# Altium PCB Modular Parent Motherboard.PcbDoc (part 2 of 2)
Units mil, origin at the board's own origin, x right, y up, seen from the top; angles counter-clockwise.
Board outline 8750 x 5625 mil, 4 copper layers (Top Layer, Internal Plane 1, Internal Plane 2, Bottom Layer), stack 30.634 mil thick; 150 components, 101 nets, 734 pads, 495 vias.
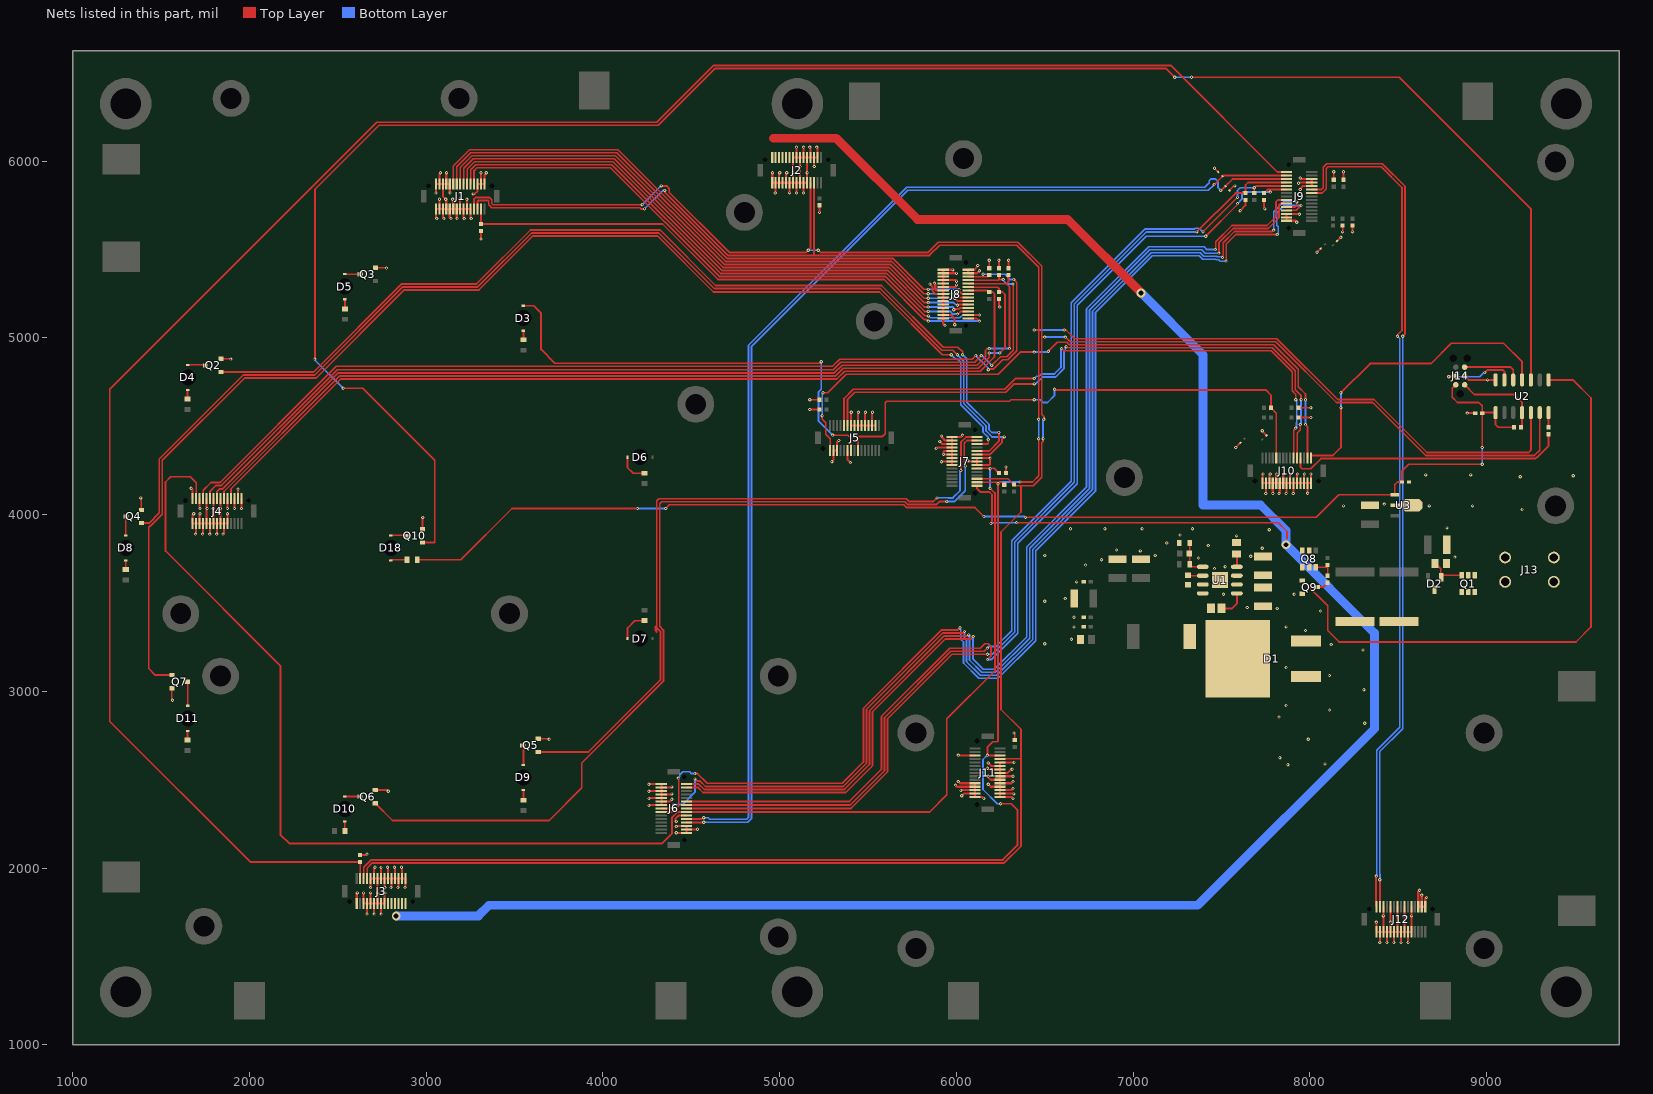
[diagram p4: the nets of this part, all layers, seen from the top]

## Via types
v1: diameter 18, hole 8, Top Layer to Bottom Layer, 492 vias
v2: diameter 50, hole 28, Top Layer to Bottom Layer, 3 vias

## Nets (pads, with @x,y where several pads share a name; then routed paths per layer and width w, separated by ;. In a path a pad name is that pad's centre, name@x,y a point inside that pad or via, vN(x,y) a via of type N, cw(c..) or ccw(c..) an arc to the next point about the centre after c; other vN are vias at no path point) (continued)
GND: C1.1 C2.1 C4.1 C5.1 C7.1 C8.1 C9.2 C10.2 C11.2 C12.2 C13.1 C14.2 D1.1 D1.3 D12.1 D13.1 D14.1 D15.1 D16.1 D17.1 J1.5 J1.6 J1.7 J1.8 J1.9 J1.10 J1.11 J1.12 J1.13 J1.14 J1.15 J1.16 J1.17 J1.18 J1.19 J1.20 J1.28 J1.29 J1.30 J2.5 J2.6 J2.7 J2.8 J2.9 J2.10 J2.11 J2.12 J2.13 J2.14 J2.15 J2.22 J2.23 J2.24 J2.25 J2.26 J2.27 J2.28 J2.29 J3.5 J3.6 J3.7 J3.8 J3.9 J3.10 J3.11 J3.12 J3.13 J3.14 J3.15 J3.22 J3.23 J3.24 J3.25 J3.26 J3.27 J3.28 J3.30 J4.5 J4.6 J4.7 J4.8 J4.9 J4.10 J4.11 J4.12 J4.13 J4.14 J4.15 J4.16 J4.18 J4.20 J4.22 J4.24 J4.26 J4.28 J4.29 J4.30 J5.7 J5.8 J5.9 J5.10 J5.11 J5.12 J5.13 J5.14 J5.25 J5.28 J5.29 J6.9 J6.10 J6.11 J6.12 J6.13 J6.14 J6.15 J6.25 J6.28 J6.29 J6.30 J7.7 J7.8 J7.9 J7.10 J7.11 J7.12 J7.13 J7.14 J7.15 J7.22 J7.23 J7.24 J8.1 J8.2 J8.3 J8.4 J8.5 J8.6 J8.7 J8.8 J8.9 J8.10 J8.11 J8.12 J8.13 J8.14 J8.15 J8.16 J8.17 J9.3 J9.4 J9.5 J9.16 J9.17 J9.18 J10.16 J10.17 J10.18 J10.19 J10.20 J10.21 J10.22 J10.23 J10.24 J10.25 J10.26 J10.27 J10.28 J10.29 J10.30 J11.5 J11.6 J11.7 J11.8 J11.9 J11.10 J11.11 J11.12 J11.13 J11.14 J11.15 J11.16 J11.17 J11.18 J11.19 J11.20 J11.28 J12.5 J12.6 J12.7 J12.8 J12.9 J12.10 J12.11 J12.12 J12.13 J12.14 J12.15 J12.18 J12.20 J12.22 J12.24 J12.26 J12.28 J12.29 J12.30 J13.3 J13.4 J14.3 Q2.2 Q3.2 Q4.2 Q5.2 Q6.2 Q7.2 Q9.2 Q10.2 R1.1 R2.1 R3.1 R4.1 R5.1 R7.1 R8.1 R10.1 R11.1 R22.1 R26.1 R27.1 R28.1 R29.1 R31.1 R32.1 R33.1 R34.1 R35.1 R36.1 R38.1 R39.1 R40.1 R41.1 U1.7 U1.9 U2.14 U3.2 | length 15860
  Top Layer w10: v1(1385,4095) 1388.31,4091.69 Q4.2@1388.31,4027.4 ; Q7.2@1559.72,3017.6 1559.72,2955.28 v1(1565,2950) ; Q2.2@1838.31,4882.4 1892.6,4882.4 v1(1895,4880) ; R3.1@2625,2074.68 2659.68,2074.68 v1(2665,2080) ; Q6.2@2711.61,2442.4 2777.6,2442.4 v1(2785,2435) ; Q3.2@2713.31,5397.4 2772.6,5397.4 v1(2775,5395) ; Q10.2@2978.31,3917.4 2978.31,3983.31 v1(2980,3985) ; v1(3310,5560) R1.1@3310,5605.31 ; Q5.2@3633.31,2732.4 3692.6,2732.4 v1(3695,2730) ; v1(5170,4595) R31.1@5225,4595 ; v1(5170,4650) R32.1@5225.31,4650 ; v1(5225,5710) R2.1@5225,5750.31 ; R36.1@6185,5394.69 v1(6185,5440) ; R33.1@6240,5220.31 6240,5180 v1(6245,5175) ; R35.1@6240,5394.69 v1(6240,5440) ; R22.1@6279.69,4235 6279.69,4269.69 v1(6280,4270) ; R34.1@6295,5394.69 v1(6295,5440) ; v1(6325,2765) 6330,2760 R4.1@6330,2724.37 ; v1(7460,5960) D14.1@7481.62,5938.38 ; D15.1@7545,5835 7570,5860 v1(7575,5860) ; v1(7580,4380) D13.1@7606.62,4406.62 ; v1(7605,5720) 7635,5750 R28.1@7635,5780 ; v1(7730,4475) 7730,4471.77 D12.1@7753.38,4448.38 ; R29.1@7740,5780.31 7740,5735 v1(7745,5730) ; R27.1@7934.69,4550 v1(8005,4550) ; R26.1@7934.69,4605 v1(8005,4605) ; v1(8040,5485) D17.1@8061.62,5506.62 ; R41.1@8135,5894.69 v1(8135,5940) ; D16.1@8153.38,5548.38 v1(8175,5570) ; v1(8185,5600) R38.1@8185,5635.31 ; R40.1@8190,5895 v1(8190,5940) ; v1(8240,5600) R39.1@8240,5635.31 ; J14.3@8875,4785 8897.48,4762.52 U2.14@9050,4762.52 ; v1(8890,4575) C12.2@8935.31,4575
  Top Layer w11.8: v1(1670,4150) 1678.78,4141.22 J4.16@1678.78,4091.73 ; v1(1685,4005) 1678.78,3998.78 J4.15@1678.78,3950 J4.14@1698.46,3950 ; v1(1695,3890) 1698.46,3893.46 J4.14@1698.46,3950 ; J4.18@1718.15,4091.73 1718.15,4036.85 v1(1720,4035) ; v1(1720,4005) 1718.15,4003.15 J4.13@1718.15,3950 ; v1(1735,3890) 1737.83,3892.83 J4.12@1737.83,3950 ; J4.20@1757.52,4091.73 v1@1757.52,4037.48 ; v1(1760,4035) v1@1757.52,4037.48 ; v1(1775,3890) 1777.2,3892.2 J4.10@1777.2,3950 ; J4.22@1796.89,4091.73 1796.89,4036.89 v1(1795,4035) 1796.89,4033.11 J4.9@1796.89,3950 ; v1(1815,3890) 1816.57,3891.57 J4.8@1816.57,3950 ; J4.24@1836.26,4091.73 1836.26,4036.26 v1(1835,4035) 1836.26,4033.74 J4.7@1836.26,3950 ; v1(1850,3890) 1855.94,3895.94 J4.6@1855.94,3950 ; v1(1875,4005) 1875.63,4004.37 J4.5@1875.63,3950 J4.6@1855.94,3950 ; v1(1875,4035) 1875.63,4035.63 J4.26@1875.63,4091.73 ; v1(1915,4035) J4.28@1915,4091.73 ; J4.29@1934.68,4091.73 1934.68,4144.68 v1(1935,4145) ; J4.30@1954.37,4091.73 1954.37,4035.63 v1(1955,4035) ; J3.30@2606.73,1799.8 2606.73,1856.73 v1(2610,1860) ; v1(2645,1860) 2646.1,1858.9 J3.28@2646.1,1799.8 J3.27@2665.79,1799.8 ; v1(2665,1740) 2665.79,1740.79 J3.27@2665.79,1799.8 ; v1(2685,1860) 2685.47,1859.53 J3.26@2685.47,1799.8 ; v1(2685,1890) 2685.47,1890.47 J3.5@2685.47,1941.54 J3.6@2705.16,1941.54 ; v1(2705,1740) 2705.16,1740.16 J3.25@2705.16,1799.8 ; v1(2710,2005) 2705.16,2000.16 J3.6@2705.16,1941.54 ; v1(2725,1860) v1@2724.84,1859.84 ; 2725,1890 2724.84,1890.16 ; v1(2744.53,2004.53) J3.8@2744.53,1941.54 ; v1(2745,1740) 2744.53,1740.47 J3.23@2744.53,1799.8 ; v1(2765,1860) 2764.21,1859.21 J3.22@2764.21,1799.8 J3.23@2744.53,1799.8 ; v1(2765,1890) 2764.21,1890.79 J3.9@2764.21,1941.54 ; v1(2780,2005) 2783.9,2001.1 J3.10@2783.9,1941.54 ; v1(2800,1890) 2803.58,1893.58 J3.11@2803.58,1941.54 ; v1(2820,2005) 2823.27,2001.73 J3.12@2823.27,1941.54 ; v1(2840,1890) 2842.95,1892.95 J3.13@2842.95,1941.54 ; v1(2860,2005) 2862.64,2002.36 J3.14@2862.64,1941.54 ; v1(2880,1890) 2882.32,1892.32 J3.15@2882.32,1941.54 J3.14@2862.64,1941.54 ; v1(3055,5820) 3054.41,5820.59 J1.16@3054.41,5871.73 J1.17@3074.09,5871.73 ; v1(3060,5675) 3054.41,5680.59 J1.15@3054.41,5730 J1.14@3074.09,5730 ; v1(3075,5785) 3074.09,5784.09 J1.14@3074.09,5730 ; v1(3080,5935) 3074.09,5929.09 J1.17@3074.09,5871.73 ; v1(3100,5675) 3093.78,5681.22 J1.13@3093.78,5730 ; v1(3115,5935) 3113.46,5933.46 J1.19@3113.46,5871.73 ; v1(3135,5820) 3133.15,5821.85 J1.20@3133.15,5871.73 J1.19@3113.46,5871.73 ; v1(3140,5675) 3133.15,5681.85 J1.11@3133.15,5730 ; v1(3150,5785) 3152.83,5782.17 J1.10@3152.83,5730 ; v1(3175,5675) 3172.52,5677.48 J1.9@3172.52,5730 ; v1(3190,5785) 3192.2,5782.8 J1.8@3192.2,5730 ; v1(3215,5675) 3211.89,5678.11 J1.7@3211.89,5730 ; v1(3230,5785) 3231.57,5783.43 J1.6@3231.57,5730 ; v1(3255,5675) 3251.26,5678.74 J1.5@3251.26,5730 J1.6@3231.57,5730 ; v1(3265,5815) 3275,5815 3290.63,5830.63 J1.28@3290.63,5871.73 J1.29@3310.31,5871.73 ; v1(3310,5935) 3310.31,5934.69 J1.29@3310.31,5871.73 ; v1(3340,5935) 3340,5930 3330,5920 J1.30@3330,5871.73 J1.29@3310.31,5871.73 ; v1(4260,2355) 4262.48,2357.48 J6.9@4330,2357.48 J6.10@4330,2377.17 ; v1(4260,2395) 4261.85,2396.85 J6.11@4330,2396.85 ; v1(4260,2435) 4261.22,2436.22 J6.13@4330,2436.22 ; v1(4260,2475) 4260.59,2475.59 J6.15@4330,2475.59 J6.14@4330,2455.91 ; v1(4390,2390) 4377.17,2377.17 J6.10@4330,2377.17 ; v1(4390,2420) 4386.54,2416.54 J6.12@4330,2416.54 ; v1(4390,2460) 4385.91,2455.91 J6.14@4330,2455.91 ; v1(4415,2200) J6.30@4471.73,2200 J6.29@4471.73,2219.69 ; v1(4415,2235) 4419.37,2239.37 J6.28@4471.73,2239.37 J6.29@4471.73,2219.69 ; v1(4415,2265) 4410,2270 4410,2279.69 4428.74,2298.43 J6.25@4471.73,2298.43 ; v1(4535,2220) 4534.69,2219.69 J6.29@4471.73,2219.69 ; v1(4960,5935) 4957.52,5932.52 J2.15@4957.52,5878.27 J2.14@4977.2,5878.27 ; v1(4975,5820) 4977.2,5822.2 J2.14@4977.2,5878.27 ; v1(5000,5935) 4996.89,5931.89 J2.13@4996.89,5878.27 ; v1(5040,5935) 5036.26,5931.26 J2.11@5036.26,5878.27 ; v1(5055.94,5820.94) J2.10@5055.94,5878.27 ; v1(5095,5820) 5095.31,5820.31 J2.8@5095.31,5878.27 ; v1(5095,6080) 5095.31,6079.69 J2.23@5095.31,6020 ; v1(5134.68,5820.32) J2.6@5134.68,5878.27 ; v1(5135,6080) 5135,6020.32 J2.25@5134.68,6020 ; v1(5155,5935) v1@5154.37,5934.37 ; v1(5170,6080) 5174.05,6075.95 J2.27@5174.05,6020 ; v1(5195,5970) 5193.74,5971.26 J2.28@5193.74,6020 ; v1(5210,6080) 5213.42,6076.58 J2.29@5213.42,6020 J2.28@5193.74,6020 ; v1(5295,4300) 5305.32,4310.32 J5.29@5305.32,4363.27 J5.28@5325,4363.27 5325,4410 v1(5335,4420) ; J5.25@5384.06,4363.27 5384.06,4310.94 v1(5400,4295) ; v1(5405,4580) 5403.74,4578.74 J5.7@5403.74,4505 J5.8@5423.43,4505 J5.9@5443.11,4505 ; v1(5445,4580) 5443.11,4578.11 J5.9@5443.11,4505 ; v1(5485,4580) 5482.48,4577.48 J5.11@5482.48,4505 ; v1(5525,4580) 5521.85,4576.85 J5.13@5521.85,4505 ; J5.14@5541.54,4505 J5.13@5521.85,4505 ; v1(5850,5305) 5865,5290 5865,5265 5881.89,5248.11 J8.8@5925,5248.11 ; v1(5875,5310) 5880,5305 5880,5275 5887.2,5267.8 J8.9@5925,5267.8 ; v1(5885,4375) 5890.32,4380.32 J7.12@5975,4380.32 ; v1(5905,4415) 5920,4400 J7.13@5975,4400 ; v1(5915,4300) 5916.58,4301.58 J7.8@5975,4301.58 ; v1(5915,4445) 5915,4440 5935.31,4419.69 J7.14@5975,4419.69 ; v1(5935,5070) 5925,5080 J8.1@5925,5110.31 J8.2@5925,5130 ; J7.7@5975,4281.89 J7.8@5975,4301.58 ; v1(5980,5385) 5979.09,5385.91 J8.15@5925,5385.91 J8.14@5925,5366.22 ; v1(5990,5075) 5990,5110 5970,5130 J8.2@5925,5130 ; v1(5995,2470) 6004.06,2460.94 J11.19@6105,2460.94 ; v1(6000,5300) 6000,5295 5992.48,5287.48 J8.10@5925,5287.48 ; v1(6000,5320) 6000,5325 5998.15,5326.85 J8.12@5925,5326.85 ; v1(6000,5365) 5998.78,5366.22 J8.14@5925,5366.22 ; v1(6010,2490) 6019.37,2480.63 J11.20@6105,2480.63 J11.19@6105,2460.94 ; v1(6010,2640) 6011.89,2638.11 J11.28@6105,2638.11 ; v1(6025,2440) 6026.26,2441.26 J11.18@6105,2441.26 ; v1(6030,2410) 6041.57,2421.57 J11.17@6105,2421.57 ; v1(6035,4450) 6024.37,4439.37 J7.15@5975,4439.37 J7.14@5975,4419.69 ; v1(6065,4305) 6068.42,4301.58 J7.23@6116.73,4301.58 ; v1(6120,5410) 6120,5405 6100.91,5385.91 J8.16@6066.73,5385.91 J8.17@6066.73,5366.22 6116.22,5366.22 v1(6130,5380) ; v1(6155,2395) 6148.11,2401.89 J11.16@6105,2401.89 J11.17@6105,2421.57 ; v1(6175,2565) 6180.63,2559.37 J11.7@6246.73,2559.37 ; v1(6180,2475) 6194.06,2460.94 J11.12@6246.73,2460.94 ; v1(6180,2520) 6180,2515 6194.69,2500.32 J11.10@6246.73,2500.32 ; v1(6180,2595) 6195.94,2579.06 J11.6@6246.73,2579.06 ; v1(6315,2560) 6310,2560 6289.69,2539.69 J11.8@6246.73,2539.69 ; v1(6320,2395) 6313.11,2401.89 J11.15@6246.73,2401.89 J11.14@6246.73,2421.57 ; v1(6320,2450) 6311.26,2441.26 J11.13@6246.73,2441.26 ; v1(6320,2490) 6310.63,2480.63 J11.11@6246.73,2480.63 ; v1(6320,2520) J11.9@6246.73,2520 ; v1(6325,2420) 6323.43,2421.57 J11.14@6246.73,2421.57 ; v1(6326.26,2598.74) J11.5@6246.73,2598.74 J11.6@6246.73,2579.06 ; v1(7735,4230) 7730.63,4225.63 J10.30@7730.63,4178.27 J10.29@7750.32,4178.27 ; v1(7750,4120) 7750.32,4120.32 J10.29@7750.32,4178.27 ; v1(7775,4230) 7770,4225 J10.28@7770,4178.27 ; v1(7790,4120) 7789.69,4120.31 J10.27@7789.69,4178.27 ; v1(7810,4230) 7809.37,4229.37 J10.26@7809.37,4178.27 ; v1(7825,4120) 7829.06,4124.06 J10.25@7829.06,4178.27 ; v1(7850,4230) 7848.74,4228.74 J10.24@7848.74,4178.27 ; v1(7865,4120) 7868.43,4123.43 J10.23@7868.43,4178.27 ; v1(7890,4230) 7888.11,4228.11 J10.22@7888.11,4178.27 ; v1(7905,4120) 7907.8,4122.8 J10.21@7907.8,4178.27 ; v1(7925,5655) 7917.17,5662.83 J9.16@7868.27,5662.83 J9.17@7868.27,5682.52 J9.18@7868.27,5702.2 7937.8,5702.2 v1(7940,5700) ; v1(7930,4230) 7927.48,4227.48 J10.20@7927.48,4178.27 ; v1(7935,5875) 7939.37,5879.37 J9.4@8010,5879.37 ; v1(7945,5840) 7945,5845 7959.68,5859.68 J9.5@8010,5859.68 J9.4@8010,5879.37 ; v1(7945,5905) 7950.95,5899.05 J9.3@8010,5899.05 J9.4@8010,5879.37 ; v1(7970,4230) 7966.85,4226.85 J10.18@7966.85,4178.27 ; v1(7986.54,4121.54) J10.17@7986.54,4178.27 ; v1(8005,4230) 8006.22,4228.78 J10.16@8006.22,4178.27 J10.17@7986.54,4178.27 ; v1(8375,1695) 8376.57,1693.43 J12.15@8376.57,1640 J12.14@8396.26,1640 ; v1(8395,1580) 8396.26,1581.26 J12.14@8396.26,1640 ; J12.18@8415.94,1781.73 8415.94,1730.94 v1(8415,1730) 8415.94,1729.06 J12.13@8415.94,1640 ; v1(8435,1580) 8435.63,1580.63 J12.12@8435.63,1640 ; J12.20@8455.32,1781.73 8455.32,1695.32 v1(8455,1695) 8455.32,1694.68 J12.11@8455.32,1640 ; v1(8475,1580) J12.10@8475,1640 ; J12.22@8494.68,1781.73 v1@8494.68,1730.32 ; 8495,1695 8494.68,1694.68 ; v1(8495,1730) v1@8494.68,1730.32 ; v1(8515,1580) 8514.37,1580.63 J12.8@8514.37,1640 ; J12.24@8534.06,1781.73 v1@8534.06,1694.06 ; v1(8535,1695) v1@8534.06,1694.06 ; v1(8555,1580) 8553.74,1581.26 J12.6@8553.74,1640 ; J12.26@8573.43,1781.73 v1@8573.43,1731.57 ; v1(8575,1730) v1@8573.43,1731.57 ; v1(8620,1875) 8612.8,1867.8 J12.28@8612.8,1781.73 J12.29@8632.48,1781.73 ; v1(8632.48,1847.48) J12.29@8632.48,1781.73 ; v1(8660,1835) 8652.17,1827.17 J12.30@8652.17,1781.73 J12.29@8632.48,1781.73 ; J4.14@1698.46,3950 J4.13@1718.15,3950 ; J4.13@1718.15,3950 J4.12@1737.83,3950 ; J4.12@1737.83,3950 J4.11@1757.52,3950 ; J4.11@1757.52,3950 J4.10@1777.2,3950 ; J4.11@1757.52,3950 v1@1757.52,4037.48 ; J4.10@1777.2,3950 J4.9@1796.89,3950 ; J4.9@1796.89,3950 J4.8@1816.57,3950 ; J4.8@1816.57,3950 J4.7@1836.26,3950 ; J4.7@1836.26,3950 J4.6@1855.94,3950 ; J3.27@2665.79,1799.8 J3.26@2685.47,1799.8 ; J3.26@2685.47,1799.8 J3.25@2705.16,1799.8 ; J3.25@2705.16,1799.8 J3.24@2724.84,1799.8 ; J3.6@2705.16,1941.54 J3.7@2724.84,1941.54 ; J3.24@2724.84,1799.8 v1@2724.84,1859.84 ; J3.24@2724.84,1799.8 J3.23@2744.53,1799.8 ; v1@2724.84,1859.84 2724.84,1890.16 ; 2724.84,1890.16 J3.7@2724.84,1941.54 ; J3.7@2724.84,1941.54 J3.8@2744.53,1941.54 ; J3.8@2744.53,1941.54 J3.9@2764.21,1941.54 ; J3.9@2764.21,1941.54 J3.10@2783.9,1941.54 ; J3.10@2783.9,1941.54 J3.11@2803.58,1941.54 ; J3.11@2803.58,1941.54 J3.12@2823.27,1941.54 ; J3.12@2823.27,1941.54 J3.13@2842.95,1941.54 ; J3.13@2842.95,1941.54 J3.14@2862.64,1941.54 ; J1.14@3074.09,5730 J1.13@3093.78,5730 ; J1.17@3074.09,5871.73 J1.18@3093.78,5871.73 ; J1.13@3093.78,5730 J1.12@3113.46,5730 ; J1.18@3093.78,5871.73 3093.78,5801.22 v1(3110,5785) 3113.46,5781.54 J1.12@3113.46,5730 ; J1.18@3093.78,5871.73 J1.19@3113.46,5871.73 ; J1.12@3113.46,5730 J1.11@3133.15,5730 ; J1.11@3133.15,5730 J1.10@3152.83,5730 ; J1.10@3152.83,5730 J1.9@3172.52,5730 ; J1.9@3172.52,5730 J1.8@3192.2,5730 ; J1.8@3192.2,5730 J1.7@3211.89,5730 ; J1.7@3211.89,5730 J1.6@3231.57,5730 ; J6.10@4330,2377.17 J6.11@4330,2396.85 ; J6.11@4330,2396.85 J6.12@4330,2416.54 ; J6.12@4330,2416.54 J6.13@4330,2436.22 ; J6.13@4330,2436.22 J6.14@4330,2455.91 ; J2.14@4977.2,5878.27 J2.13@4996.89,5878.27 ; J2.13@4996.89,5878.27 J2.12@5016.57,5878.27 J2.11@5036.26,5878.27 ; J2.11@5036.26,5878.27 J2.10@5055.94,5878.27 ; J2.10@5055.94,5878.27 J2.9@5075.63,5878.27 ; J2.9@5075.63,5878.27 v1(5075.63,5934.37) J2.22@5075.63,6020 J2.23@5095.31,6020 ; J2.9@5075.63,5878.27 J2.8@5095.31,5878.27 ; J2.8@5095.31,5878.27 J2.7@5115,5878.27 ; J2.23@5095.31,6020 J2.24@5115,6020 ; J2.7@5115,5878.27 5115,5935 v1(5115,5970) J2.24@5115,6020 ; J2.7@5115,5878.27 J2.6@5134.68,5878.27 ; J2.24@5115,6020 J2.25@5134.68,6020 ; J2.6@5134.68,5878.27 J2.5@5154.37,5878.27 v1@5154.37,5934.37 ; J2.25@5134.68,6020 J2.26@5154.37,6020 ; v1@5154.37,5934.37 J2.26@5154.37,6020 ; J2.26@5154.37,6020 J2.27@5174.05,6020 ; J2.27@5174.05,6020 J2.28@5193.74,6020 ; J5.9@5443.11,4505 J5.10@5462.8,4505 J5.11@5482.48,4505 ; J5.11@5482.48,4505 J5.12@5502.17,4505 J5.13@5521.85,4505 ; J8.2@5925,5130 J8.3@5925,5149.69 J8.4@5925,5169.37 J8.5@5925,5189.06 J8.6@5925,5208.74 J8.7@5925,5228.43 J8.8@5925,5248.11 ; J8.8@5925,5248.11 J8.9@5925,5267.8 ; J8.9@5925,5267.8 J8.10@5925,5287.48 ; J8.10@5925,5287.48 J8.11@5925,5307.17 J8.12@5925,5326.85 ; J8.12@5925,5326.85 J8.13@5925,5346.54 J8.14@5925,5366.22 ; J7.8@5975,4301.58 J7.9@5975,4321.26 J7.10@5975,4340.95 ; J7.10@5975,4340.95 v1(5925.95,4340.95) 5925.95,4355.95 5930.63,4360.63 J7.11@5975,4360.63 ; J7.10@5975,4340.95 J7.11@5975,4360.63 ; J7.11@5975,4360.63 J7.12@5975,4380.32 ; J7.12@5975,4380.32 J7.13@5975,4400 ; J7.13@5975,4400 J7.14@5975,4419.69 ; J11.17@6105,2421.57 J11.18@6105,2441.26 ; J11.18@6105,2441.26 J11.19@6105,2460.94 ; J7.23@6116.73,4301.58 J7.24@6116.73,4281.89 6186.9,4281.9 6190,4285 v1(6190,4320) 6188.74,4321.26 J7.22@6116.73,4321.26 J7.23@6116.73,4301.58 ; J11.14@6246.73,2421.57 J11.13@6246.73,2441.26 ; J11.13@6246.73,2441.26 J11.12@6246.73,2460.94 ; J11.12@6246.73,2460.94 J11.11@6246.73,2480.63 ; J11.11@6246.73,2480.63 J11.10@6246.73,2500.32 ; J11.10@6246.73,2500.32 J11.9@6246.73,2520 ; J11.9@6246.73,2520 J11.8@6246.73,2539.69 ; J11.8@6246.73,2539.69 J11.7@6246.73,2559.37 ; J11.7@6246.73,2559.37 J11.6@6246.73,2579.06 ; J10.29@7750.32,4178.27 J10.28@7770,4178.27 ; J10.28@7770,4178.27 J10.27@7789.69,4178.27 ; J10.27@7789.69,4178.27 J10.26@7809.37,4178.27 ; J10.26@7809.37,4178.27 J10.25@7829.06,4178.27 ; J10.25@7829.06,4178.27 J10.24@7848.74,4178.27 ; J10.24@7848.74,4178.27 J10.23@7868.43,4178.27 ; J10.23@7868.43,4178.27 J10.22@7888.11,4178.27 ; J10.22@7888.11,4178.27 J10.21@7907.8,4178.27 ; J10.21@7907.8,4178.27 J10.20@7927.48,4178.27 ; J10.20@7927.48,4178.27 J10.19@7947.17,4178.27 J10.18@7966.85,4178.27 ; J10.18@7966.85,4178.27 J10.17@7986.54,4178.27 ; J12.14@8396.26,1640 J12.13@8415.94,1640 ; J12.13@8415.94,1640 J12.12@8435.63,1640 ; J12.12@8435.63,1640 J12.11@8455.32,1640 ; J12.11@8455.32,1640 J12.10@8475,1640 ; J12.10@8475,1640 J12.9@8494.68,1640 ; J12.9@8494.68,1640 8494.68,1694.68 ; J12.9@8494.68,1640 J12.8@8514.37,1640 ; 8494.68,1694.68 v1@8494.68,1730.32 ; J12.8@8514.37,1640 J12.7@8534.06,1640 ; J12.7@8534.06,1640 v1@8534.06,1694.06 ; J12.7@8534.06,1640 J12.6@8553.74,1640 ; J12.6@8553.74,1640 J12.5@8573.43,1640 v1@8573.43,1731.57
  other v1: 7875,2585 8085,2590 7830,2625 7990,2730 8310,2820 7825,2855 8110,2895 7865,2920 8305,3010 8110,3090 7865,3135 8300,3235 8120,3265 6500,3270 6650,3295 7975,3345 6665,3365 7865,3365 6665,3420 8060,3455 7815,3470 7645,3475 6500,3510 6615,3525 7510,3550 7910,3550 6680,3620 7460,3695 7520,3705 6730,3715 6820,3745 7370,3755 8820,3760 7665,3765 6500,3770 7125,3770 7040,3795 6905,3800 7730,3810 7425,3825 7190,3840 7585,3880 7265,3885 7770,3915 6645,3920 6840,3920 7050,3920 7335,3920 8775,3925 9200,4030 8190,4050 8675,4050 8920,4050 8420,4060 9190,4215 9490,4220 8655,4225 8910,4225 9005,4762.52
GPS_1PPS: J4.17 J6.24 J7.25 R22.2 | length 8615.7
  Top Layer w10: J4.17@1698.46,4091.73 1698.46,4181.54 1665,4215 1555,4215 1525,4185 1525,3795 2175,3145 2175,2190 2225,2140 4335,2140 4390,2195 4390,2285 4423.11,2318.11 J6.24@4471.73,2318.11 5848.11,2318.11 5945,2415 5945,2845 6218,3118 6218,4122 v1(6190,4150) ; J7.25@6116.73,4262.21 6213.11,4262.21 R22.2@6240.31,4235
  Bottom Layer w10: v1(6190,4150) v1(6190,4260)
HEARTBEAT_LED: J7.21 Q4.1 | length 6580.9
  Top Layer w10: Q4.1@1388.31,3952.6 1432.6,3952.6 1490,4010 1490,4315 1965.6,4790.6 2369.64,4790.6 2867.64,5288.6 3291.68,5288.6 3596.77,5593.69 4315.9,5593.69 4629.58,5280 5568.83,5280 5917.83,4931 5979,4931 v1(6005,4905) ; J7.21@6116.73,4340.95 6116.79,4341 6190.04,4341 6257,4407.96 6257,4427 v1(6270,4440)
  Bottom Layer w10: v1(6005,4905) 6041,4869 6041,4629 6167,4503 6167,4474.26 6201.26,4440 v1(6270,4440)
HOSTRX_CELLTX: J5.6 J10.11 | length 3443.6
  Top Layer w10: J5.6@5384.06,4505 5384,4505.06 5384,4652.83 5424.17,4693 6279.17,4693 6326.17,4740 v1(6440,4740) ; v1(6620,4950) 6625,4945 7787.12,4945 7916.74,4815.38 7916.74,4707.3 7950,4674.04 v1(7950,4650) ; J10.11@7927.48,4320 7927.48,4462.48 7945,4480 v1(7945,4510)
  Bottom Layer w10: v1(6440,4740) 6448.08,4740 6487.08,4779 6561.12,4779 6608,4825.88 6608,4923.3 6616,4931.3 6616,4946 v1(6620,4950) ; v1(7945,4510) 7950,4515 v1(7950,4650)
HOSTRX_EXPTX: J9.7 J12.16 | length 4828.9
  Top Layer w10: J9.7@8010,5820.31 8069.36,5820.31 8092,5842.96 8092,5957.96 8102.04,5968 8402.96,5968 8520.46,5850.5 8520.46,5042.48 8495,5017.02 v1(8495,5010) ; v1(8375,1955) 8374,1954 8374,1784.31 J12.16@8376.57,1781.73
  Bottom Layer w10: v1(8375,1955) 8375,1960 8378,1963 8378,2667.04 8508,2797.04 8508,4997 v1(8495,5010)
HOSTRX_SATTX: J6.16 J9.21 | length 6200.2
  Top Layer w10: J6.16@4471.73,2475.59 4542.49,2475.59 4572.92,2445.17 5365.92,2445.17 5508,2587.25 5508,2891.08 5930.92,3314 6064,3314 v1(6070,3320) ; v1(7485,5480) 7486,5481 7486,5508.7 7485,5509.7 7485,5537.88 7566.12,5619 7764,5619 7824.77,5679.77 7824.77,5752.45 7833.58,5761.26 J9.21@7868.27,5761.26
  Bottom Layer w10: v1(6070,3320) 6074,3316 6074,3177.92 6143.92,3108 6221.08,3108 6414.27,3301.19 6414.27,3810.02 6752,4147.75 6752,5156.79 7094.21,5499 7386.96,5499 7406.96,5479 7484,5479 v1(7485,5480)
HOSTTX_CELLRX: J5.5 J10.10 | length 3426.4
  Top Layer w10: J5.5@5364.37,4505 5364.37,4657.25 5417.12,4710 6272.12,4710 6332.12,4770 v1(6440,4770) ; v1(6595,4940) 6607,4928 7780.08,4928 7899.74,4808.34 7899.74,4700.26 7920,4680 v1(7920,4650) ; J10.10@7907.8,4320 7907.8,4477.8 v1(7920,4490)
  Bottom Layer w10: v1(6440,4770) 6453,4783 6467.04,4783 6480.04,4796 6554.08,4796 6591,4832.92 6591,4936 v1(6595,4940) ; v1(7920,4490) 7925,4495 7925,4500.3 7924,4501.3 7924,4518.7 7925,4519.7 7925,4645 v1(7920,4650)
HOSTTX_EXPRX: J9.6 J12.17 | length 4843.8
  Top Layer w10: J9.6@8010,5840 8065,5840 8075,5850 8075,5965 8095,5985 8410,5985 8537.46,5857.54 8537.46,5022.46 v1(8525,5010) ; v1(8395,1935) 8396.26,1933.74 J12.17@8396.26,1781.73
  Bottom Layer w10: v1(8395,1935) 8396,1936 8396,1963.7 8395,1964.7 8395,2660 8525,2790 v1(8525,5010)
HOSTTX_SATRX: J6.17 J9.22 | length 6180
  Top Layer w10: J6.17@4471.73,2455.91 4538.14,2455.91 4565.88,2428.17 5372.96,2428.17 5525,2580.21 5525,2884.04 5937.96,3297 6082,3297 v1(6095,3310) ; v1(7465,5500) 7467,5502 7467,5543.92 7559.08,5636 7756.96,5636 7807.77,5686.81 7807.77,5769.69 7819.03,5780.94 J9.22@7868.27,5780.94
  Bottom Layer w10: v1(6095,3310) 6094,3309 6094,3181.96 6150.96,3125 6214.04,3125 6397.27,3308.23 6397.27,3817.07 6735,4154.79 6735,5163.83 7087.17,5516 7401.04,5516 7417.04,5500 v1(7465,5500)
KILL_EVERYTHING: Q9.1 U2.8 | length 3471.4
  Top Layer w10: Q9.1@7956.69,3627.4 8100,3484.09 8100,3345 8165,3280 9505,3280 9590,3365 9590,4660 9487.48,4762.52 U2.8@9350,4762.52
L\O\R\A\_\C\S\: J4.27 J8.22 R30.1 | length 5196.4
  Top Layer w10: J4.27@1895.31,4091.73 1895.31,4146.27 2517.04,4768 5323,4768 5367,4812 6134.33,4812 6215,4892.67 6215,5250 6205.31,5259.69 R30.1@6185,5259.69 6176.89,5267.8 J8.22@6066.73,5267.8
LORA_ACTIVITY_LED: J7.20 Q2.1 | length 5575
  Top Layer w10: Q2.1@1838.31,4807.6 2362.6,4807.6 2860.6,5305.6 3284.64,5305.6 3589.73,5610.69 4322.94,5610.69 4636.63,5297 5575.88,5297 5924.88,4948 6007.96,4948 6035,4920.96 v1(6035,4905) ; J7.20@6116.73,4360.63 6185.63,4360.63 6240,4415 v1(6240,4465)
  Bottom Layer w10: v1(6035,4905) 6058,4882 6058,4637 6184,4511 6184,4481.3 6200.3,4465 v1(6240,4465)
LORA_EXP1: J1.27 J8.29 | length 3362.5
  Top Layer w10: J1.27@3270.94,5871.73 3270.94,5946.9 3287.04,5963 4042.75,5963 4657.75,5348 5597,5348 5820,5125 v1(5840,5125) ; J8.29@6066.73,5130 v1(6130,5130)
  Bottom Layer w10: v1(5840,5125) 5851,5114 6019,5114 6035,5130 v1(6130,5130)
LORA_EXP2: J1.26 J8.28 | length 3263
  Top Layer w10: J1.26@3251.26,5871.73 3251.26,5951.26 3280,5980 4049.79,5980 4664.79,5365 5604.04,5365 5819.04,5150 v1(5840,5150) ; v1(6005,5135) 6008.74,5135 6023.43,5149.69 J8.28@6066.73,5149.69
  Bottom Layer w10: v1(5840,5150) 5965,5150 5980,5135 v1(6005,5135)
LORA_EXP3: J1.25 J8.27 | length 3292.6
  Top Layer w10: J1.25@3231.57,5871.73 3231.57,5955.62 3272.96,5997 4056.83,5997 4671.83,5382 5611.08,5382 5818.08,5175 v1(5840,5175) ; v1(5985,5160) 5989,5164 6013.7,5164 6019.07,5169.37 J8.27@6066.73,5169.37
  Bottom Layer w10: v1(5840,5175) 5980,5175 5985,5170 v1(5985,5160)
LORA_EXP4: J1.24 J8.26 | length 3310.5
  Top Layer w10: J1.24@3211.89,5871.73 3211.89,5959.97 3265.92,6014 4063.88,6014 4678.88,5399 5618.12,5399 5817.12,5200 v1(5840,5200) ; v1(6005,5185) 6009.06,5189.06 J8.26@6066.73,5189.06
  Bottom Layer w10: v1(5840,5200) 5985,5200 6000,5185 v1(6005,5185)
LORA_EXP5: J1.23 J8.25 | length 3335.3
  Top Layer w10: J1.23@3192.2,5871.73 3192.2,5964.33 3258.88,6031 4070.92,6031 4685.92,5416 5625.17,5416 5816.17,5225 v1(5840,5225) ; v1(5990,5225) 6006.26,5208.74 J8.25@6066.73,5208.74
  Bottom Layer w10: v1(5840,5225) v1(5990,5225)
LORA_EXP6: J1.22 J8.24 | length 3363.5
  Top Layer w10: J1.22@3172.52,5871.73 3172.52,5968.69 3251.83,6048 4077.96,6048 4692.96,5433 5632.21,5433 5815.21,5250 v1(5840,5250) ; v1(6000,5250) 6021.57,5228.43 J8.24@6066.73,5228.43
  Bottom Layer w10: v1(5840,5250) v1(6000,5250)
LORA_EXP7: J1.21 J8.23 | length 3397.5
  Top Layer w10: J1.21@3152.83,5871.73 3152.83,5973.04 3244.79,6065 4085,6065 4700,5450 5639.25,5450 5814.25,5275 v1(5840,5275) ; v1(6015,5275) 6015,5265 6031.89,5248.11 J8.23@6066.73,5248.11
  Bottom Layer w10: v1(5840,5275) v1(6015,5275)
LORA_PRESENT: J1.2 J8.30 R1.2 | length 3203.6
  Top Layer w10: J1.2@3310.31,5730 3310.31,5645 R1.2@3310,5644.69 4337.02,5644.69 4650.71,5331 5589.96,5331 5815.96,5105 5830,5105 v1(5840,5095) ; J8.30@6066.73,5110.31 6114.69,5110.31 v1(6130,5095)
  Bottom Layer w10: v1(5840,5095) 5841,5096 6129,5096 v1(6130,5095)
LORA_RESET: J4.19 J8.18 R36.2 | length 5782.1
  Top Layer w10: J4.19@1737.83,4091.73 1737.83,4137.83 1782,4182 1833.92,4182 2491.92,4840 5298.83,4840 5338.83,4880 6090,4880 v1(6110,4900) ; J8.18@6066.73,5346.54 6150,5346.54 ; v1(6150,5360) 6150,5346.54 ; v1(6180,4820) 6184,4824 6208.7,4824 6209.7,4825 6210,4825 6262,4877 6290.74,4877 6341,4927.26 6341,5313.7 6328.7,5326 6326,5326 6325,5327 v1(6325,5330) ; R36.2@6185,5355.31 6176.22,5346.54 6150,5346.54
  Bottom Layer w10: v1(6110,4900) 6180,4830 v1(6180,4820) ; v1(6150,5360) 6275,5360 6305,5330 v1(6325,5330)
LORA_SPI_CLK: J4.21 J8.19 R35.2 | length 5628.1
  Top Layer w10: J4.21@1777.2,4091.73 1777.2,4132.2 1810,4165 1840.96,4165 2495.96,4820 5302.88,4820 5345.88,4863 6102.7,4863 6139.7,4900 v1(6140,4900) ; J8.19@6066.73,5326.85 6236.85,5326.85 6240,5330 ; v1(6200,4845) 6249,4894 6283.7,4894 6321,4931.3 6321,5304 v1(6320,5305) ; R35.2@6240,5355.31 6240,5330 ; v1(6265,5330) 6240,5330
  Bottom Layer w10: v1(6140,4900) 6145,4900 v1(6200,4845) ; v1(6265,5330) 6265,5325 6285,5305 v1(6320,5305)
LORA_SPI_MISO: J4.25 J8.21 R33.2 | length 5347.9
  Top Layer w10: J4.25@1855.94,4091.73 1855.94,4130.94 2510,4785 5315.96,4785 5359.96,4829 6124,4829 6185,4890 v1(6185,4915) ; J8.21@6066.73,5287.48 6232.52,5287.48 6240,5280 R33.2@6240,5259.69 6260.31,5259.69 6275,5245 6275,4945 v1(6245,4915)
  Bottom Layer w10: v1(6185,4915) v1(6245,4915)
LORA_SPI_MOSI: J4.23 J8.20 R34.2 | length 5522.1
  Top Layer w10: J4.23@1816.57,4091.73 1816.57,4131.57 1830,4145 1845,4145 2502,4802 5308.92,4802 5352.92,4846 6116,4846 6164,4894 6164,4929 6175,4940 v1(6185,4940) ; J8.20@6066.73,5307.17 6282.17,5307.17 ; R34.2@6295,5355.31 6295,5320 6282.17,5307.17 ; v1(6300,4940) 6300,5289.33 6282.17,5307.17
  Bottom Layer w10: v1(6185,4940) v1(6300,4940)
M\C\L\R\: J14.1 R44.2 U2.4 | length 508.6
  Top Layer w10: J14.1@8875,4735 8930,4680 9155,4680 9200,4635 U2.4@9200,4577.48 9200,4500.31 R44.2@9194.69,4495
Modem3.8V: J5.30 J10.14 | length 3742
  Top Layer w10: v1(5240,4560) 5240,4540 5260,4520 5260,4455 5285.63,4429.37 J5.30@5285.63,4363.27 ; v1(5245,4690) 5270.96,4690 5375.96,4795 6236.92,4795 6361.92,4920 v1(6440,4920) ; v1(6520,4925) 6570,4975 6624.7,4975 6637.7,4962 7794.17,4962 7933.74,4822.43 7933.74,4724.3 7975,4683.04 v1(7975,4650) ; v1(7975,4510) 7986.54,4498.46 J10.14@7986.54,4320
  Bottom Layer w10: v1(5240,4560) 5240,4685 v1(5245,4690) ; v1(6440,4920) 6515,4920 v1(6520,4925) ; v1(7975,4510) v1(7975,4650)
NetC3_1: C3.1 D1.4 L1.1 U1.8
NetC3_2: C3.2 U1.1 | length 156.4
  Top Layer w10: C3.2@7499.53,3470 7560,3470 7586.46,3496.46 U1.1@7586.46,3555
NetC6_1: C6.1 R6.1 R7.2 U1.5 | length 200.2
  Top Layer w10: R7.2@7319.53,3840 R6.1@7319.53,3720 7334.53,3705 U1.5@7393.54,3705
NetC7_2: C7.2 U1.6 | length 84.6
  Top Layer w10: C7.2@7310,3657.56 7312.56,3655 U1.6@7393.54,3655
NetD2_1: D2.1 Q1.3 R11.2 | length 213.7
  Top Layer w10: R11.2@8708.5,3725 8740,3693.5 8740,3647.83 D2.1@8742.4,3645.43 8754.21,3657.24 Q1.3@8857.6,3657.24
NetD2_3: D2.3 F1.1 F2.1 Q1.4
NetD3_1: D3.1 R9.1 | length 51.1
  Top Layer w10: R9.1@3550,4989.53 D3.1@3550,5040.63
NetD4_1: D4.1 R12.2 | length 52
  Top Layer w10: R12.2@1650,4654.53 1650,4705.13 D4.1@1651,4706.13
NetD4_2: D4.2 Q2.3 | length 107.6
  Top Layer w10: D4.2@1651,4847.87 1754.56,4847.87 Q2.3@1751.69,4845
NetD5_1: D5.1 R13.2 | length 54.6
  Top Layer w10: R13.2@2540,5164.53 D5.1@2540,5219.13
NetD5_2: D5.2 Q3.3 | length 87.1
  Top Layer w10: D5.2@2540,5360.87 2625.83,5360.87 Q3.3@2626.69,5360
NetD6_1: D6.1 R14.1 | length 169.4
  Top Layer w10: D6.1@4138.13,4325 D6.1@4138.63,4325.5 4138.63,4266.37 4170.47,4234.53 R14.1@4235,4234.53
NetD7_1: D7.1 R15.1 | length 179.2
  Top Layer w10: D7.1@4134.13,3295 D7.1@4138.63,3299.5 4138.63,3358.63 4180.47,3400.47 R15.1@4235,3400.47
NetD8_1: D8.1 R16.2 | length 52.1
  Top Layer w10: R16.2@1300,3689.53 D8.1@1300,3741.63
NetD8_2: D8.2 Q4.3 | length 107.3
  Top Layer w10: D8.2@1300,3883.37 1300,3988.31 Q4.3@1301.69,3990
NetD9_1: D9.1 R17.2 | length 58.1
  Top Layer w10: R17.2@3550,2384.53 D9.1@3550,2442.63
NetD9_2: D9.2 Q5.3 | length 112
  Top Layer w10: Q5.3@3546.69,2695 3550,2691.69 D9.2@3550,2584.37
NetD10_1: D10.1 R18.2 | length 54.3
  Top Layer w10: R18.2@2539.53,2210 2539.53,2263.66 D10.1@2540,2264.13
NetD10_2: D10.2 Q6.3 | length 85.4
  Top Layer w10: D10.2@2540,2405.87 2624.13,2405.87 Q6.3@2625,2405
NetD11_1: D11.1 R19.2 | length 53
  Top Layer w10: R19.2@1650,2724.53 1650,2776.13 D11.1@1651,2777.13
NetD11_2: D11.2 Q7.3 | length 136.4
  Top Layer w10: Q7.3@1650.28,3055 1651,3054.28 D11.2@1651,2918.87
NetD18_1: D18.1 R43.2 | length 91.9
  Top Layer w10: D18.1@2800,3741.63 2803.37,3745 R43.2@2890.47,3745
NetD18_2: D18.2 Q10.3 | length 93.1
  Top Layer w10: D18.2@2800,3883.37 2888.33,3883.37 Q10.3@2891.69,3880
NetQ8_3: Q8.3 R42.1 R46.2 | length 127.9
  Top Layer w10: Q8.3@8032.4,3702.76 8100,3702.76 ; R46.2@8100,3654.69 R42.1@8100,3715
NetQ9_3: Q9.3 R46.1 | length 67.2
  Top Layer w11.8: Q9.3@8043.31,3590 8074.69,3590 R46.1@8100,3615.32
NetR5_2: R5.2 U1.4 | length 74.1
  Top Layer w10: R5.2@7585,3778.5 7586.46,3777.05 U1.4@7586.46,3705
NetR45_1: R45.1 U2.7 | length 82.8
  Top Layer w10: R45.1@9350,4494.69 U2.7@9350,4577.48
PGC: J14.5 U2.12 | length 338.7
  Top Layer w10: J14.5@8875,4835 9135,4835 9150,4820 U2.12@9150,4762.52
PGD: J14.4 U2.13 | length 433.6
  Top Layer w10: v1(8785,4780) 8780,4785 J14.4@8825,4785 ; v1(8990,4805) 9003,4818 9092,4818 9100,4810 U2.13@9100,4762.52
  Bottom Layer w10: v1(8785,4780) 8960,4780 8985,4805 v1(8990,4805)
PVin: C1.2 C2.2 J2.16 J2.17 J2.18 J2.19 J2.20 J2.21 J3.16 J3.17 J3.18 J3.19 J3.20 J3.21 J7.30 Q8.1 Q8.2 Q8.5 Q8.6 U1.2 U1.3 | length 13637.6
  Top Layer w10: J7.30@6116.73,4163.78 6116.73,4147.09 6134.82,4129 6186,4129 6201,4114 6201,3956 v1(6195,3950) ; v1(6340,3955) 7820,3955 7870,3905 7870,3865
  Top Layer w50: 4965,6130 5320,6130 5780,5670 6630,5670 v2(7045,5255)
  Bottom Layer w10: v1(6195,3950) 6200,3955 v1(6340,3955)
  Bottom Layer w50: v2(2830,1730) 3295,1730 3355,1790 7365,1790 8365,2790 8365,3330 v2(7865,3830) 7865,3910 7720,4055 7395,4055 7395,4905 v2(7045,5255)
RESET_CELL: J5.22 J10.5 R24.1 | length 3043.8
  Top Layer w10: J5.22@5443.11,4363.27 5443.11,4441.11 5445,4443 5582.04,4443 5597,4457.96 5597,4633.96 5605.04,4642 6300.29,4642 6308.29,4650 v1(6440,4650) ; v1(6555,4710) 6559,4706 7749,4706 7779.37,4675.63 R24.1@7779.37,4605 7809.37,4575 J10.5@7809.37,4320
  Bottom Layer w10: v1(6440,4650) 6475,4650 6490,4635 6515,4635 6555,4675 v1(6555,4710)
RESET_SAT: J6.22 J9.26 R25.1 | length 5983.8
  Top Layer w10: J6.22@4471.73,2357.48 5398.44,2357.48 5593,2552.04 5593,2852.04 5967.96,3227 6157,3227 v1(6175,3245) ; v1(7395,5600) v1(7590,5795) ; R25.1@7685,5819.69 v1(7685,5850) 7694.68,5859.68 J9.26@7868.27,5859.68
  Bottom Layer w10: v1(6175,3245) 6185,3255 6223.83,3255 6312.27,3343.44 6312.27,3852.27 6650,4190 6650,5200 7067,5617 7347.3,5617 7351.3,5621 7368.7,5621 7372.7,5617 7377,5617 7394,5600 v1(7395,5600) ; v1(7590,5795) 7590,5835 7605,5850 v1(7685,5850)
S\A\T\_\1\.\8\V\_\G\O\O\D\: J6.8 J9.20 | length 6682.3
  Top Layer w10: J6.8@4330,2337.8 4387.8,2337.8 4400,2350 v1(4400,2360) ; v1(4520,2505) 4532.41,2492.59 4549.53,2492.59 4579.96,2462.17 5358.87,2462.17 5491,2594.29 5491,2898.12 5923.88,3331 6041,3331 6045,3335 v1(6045,3340) ; v1(7505,5455) 7505,5465 7510,5470 7510,5538.83 7573.17,5602 7787,5602 v1(7795,5610) ; J9.20@7868.27,5741.57 7916.57,5741.57 7925,5750 v1(7925,5770)
  Bottom Layer w10: v1(4400,2360) 4450,2360 4520,2430 v1(4520,2505) ; v1(6045,3340) 6045,3300 6057,3288 6057,3168 6134,3091 6228.12,3091 6431.27,3294.15 6431.27,3802.98 6769,4140.71 6769,5149.75 7101.25,5482 7379.92,5482 7399.92,5462 7473.3,5462 7476.3,5459 7501,5459 v1(7505,5455) ; v1(7795,5610) 7795,5715 7850,5770 v1(7925,5770)
S\I\N\K\_\C\E\L\L\_\L\E\D\: D3.2 J5.24 | length 2577.8
  Top Layer w10: D3.2@3550,5182.37 3607.63,5182.37 3650,5140 3650,4935 3728,4857 5227,4857 v1(5235,4865) ; v1(5300,4450) 5385,4450 5403.74,4431.26 J5.24@5403.74,4363.27
  Bottom Layer w10: v1(5235,4865) 5235,4709.7 5219,4693.7 5219,4531 v1(5300,4450)
SAT_ACTIVITY_LED: J7.18 Q7.1 | length 7283.6
  Top Layer w10: Q7.1@1559.72,3092.4 1467.6,3092.4 1430,3130 1430,3930 1435.6,3935.6 1439.64,3935.6 1507,4002.96 1507,4307.96 1972.64,4773.6 2376.68,4773.6 2874.68,5271.6 3298.72,5271.6 3603.81,5576.69 4308.86,5576.69 4625.54,5260 5564.79,5260 5919.79,4905 v1(5970,4905) ; J7.18@6116.73,4400 6175,4400 6180,4405 v1(6180,4425)
  Bottom Layer w10: v1(5970,4905) 5995,4880 6005.96,4880 6024,4861.96 6024,4621 6140,4505 6140.96,4505 6150,4495.96 6150,4467.22 6180,4437.22 v1(6180,4425)
SAT_COMM_POSSIBLE: J6.21 J9.25 R29.2 | length 6119
  Top Layer w10: J6.21@4471.73,2377.17 5394.08,2377.17 5576,2559.08 5576,2859.08 5960.92,3244 6134,3244 6160,3270 6180,3270 6196,3254 6196,3201.3 6175,3180.3 v1(6175,3180) ; v1(7410,5575) 7590,5755 v1(7590,5760) ; R29.2@7740,5819.69 7760.31,5840 7775,5840 ; v1(7775,5825) 7775,5840 ; J9.25@7868.27,5840 7775,5840
  Bottom Layer w10: v1(6175,3180) 6196.92,3180 6346.27,3329.36 6346.27,3838.19 6684,4175.92 6684,5184.96 7074.04,5575 v1(7410,5575) ; v1(7590,5760) 7615,5785 7615,5820 7620,5825 v1(7775,5825)
SAT_PRESENT: J3.2 J9.30 R3.2 | length 11385.7
  Top Layer w10: J3.2@2626.42,1941.54 2626.42,2033.9 R3.2@2625,2035.31 2004.69,2035.31 1210,2830 1210,4710 2720,6220 4305,6220 4627,6542 7213,6542 7816.57,5938.43 J9.30@7868.27,5938.43
SAT_USB_DM: D15.2 J6.26 J9.28 | length 6548.8
  Top Layer w10: J6.26@4471.73,2278.74 4558.74,2278.74 4565,2285 v1(4570,2285) ; v1(7495,5835) 7498.23,5835 D15.2@7521.62,5858.38 7562.29,5899.05 J9.28@7868.27,5899.05
  Bottom Layer w10: v1(4570,2285) 4595,2285 4603,2277 4812.96,2277 4823,2287.04 4823,4957.04 5717.96,5852 7405,5852 7430,5877 7430,5890 7440,5900 7465,5900 7480,5885 7480,5850 v1(7495,5835)
SAT_USB_DP: D14.2 J6.27 J9.29 | length 6476.5
  Top Layer w10: J6.27@4471.73,2259.06 4569.06,2259.06 v1(4570,2260) ; v1(7457.5,5867.5) D14.2@7505,5915 7508.74,5918.74 J9.29@7868.27,5918.74
  Bottom Layer w10: v1(4570,2260) 4820,2260 4840,2280 4840,4950 5725,5835 7425,5835 v1(7457.5,5867.5)
SAT_Vcc: J6.7 J9.19 | length 6861.5
  Top Layer w10: J6.7@4330,2318.11 4393.11,2318.11 4428.24,2353.24 4428.24,2506.76 v1(4425,2510) ; v1(4520,2535) 4535,2535 4590,2480 5352.67,2480 5474,2601.33 5474,2905.17 5916.83,3348 6008,3348 v1(6020,3360) ; v1(7525,5435) 7526,5436 7526,5461.96 7527,5462.96 7527,5531.79 7580.21,5585 v1(7815,5585) ; J9.19@7868.27,5721.89 7921.89,5721.89 v1(7950,5750)
  Bottom Layer w10: v1(4425,2510) 4434.14,2519.14 4434.14,2527.61 4451.53,2545 4490,2545 4500,2535 v1(4520,2535) ; v1(6020,3360) 6020,3352.7 6024,3348.7 6024,3296 6040,3280 6040,3160.96 6126.96,3074 6235.17,3074 6448.27,3287.11 6448.27,3795.94 6786,4133.67 6786,5142.71 7108.29,5465 7372.88,5465 7392.88,5445 7466.26,5445 7469.26,5442 7483,5442 7491,5434 7524,5434 v1(7525,5435) ; v1(7815,5585) 7820,5590 7820,5630 7812,5638 7812,5707.96 7854.04,5750 7915.3,5750 7916.3,5749 7949,5749 v1(7950,5750)
SCLK: J1.4 J2.4 J3.4 J7.28 J11.4 R21.1 U2.6 | length 14982.3
  Top Layer w10: J3.4@2665.79,1941.54 2665.79,2000.79 2695,2030 6270,2030 6365,2125 6365,2618.43 ; J1.4@3270.94,5730 3270.94,5785.94 3280,5795 3357.04,5795 3371.15,5780.89 3371.15,5760.46 3378.18,5753.43 v1(4221.57,5753.43) ; v1(4330,5860) 4360,5860 4375,5845 4375,5823.08 4714.08,5484 5149,5484 v1(5161.53,5496.53) 5174.05,5509.05 J2.4@5174.05,5878.27 ; v1(5218.47,5496.53) 5231,5484 5839.96,5484 5897.96,5542 6347.04,5542 6482,5407.04 6482,5005 ; J7.28@6116.73,4203.15 6291.85,4203.15 R21.1@6325,4170 6331,4164 6365,4164 ; J11.4@6246.73,2618.43 6248.05,2619.74 6363.69,2619.74 6365,2618.43 ; v1(6490,4430) 6490,4415 6482,4407 6482,4212 6434,4164 6365,4164 ; v1(6495,4540) 6495,4555 6482,4568 6482,5005 ; v1(6500,5005) 6482,5005 ; v1(6615,5005) 6618.74,5005 6644.74,4979 7806,4979 8150,4635 8355,4635 8655,4335 9270,4335 9300,4365 U2.6@9300,4577.48 ; 6365,2618.43 6365,2785 6252,2898 6252,3902 6365,4015 6365,4164
  Bottom Layer w10: v1(4221.57,5753.43) 4328.13,5860 v1(4330,5860) ; v1(5161.53,5496.53) v1(5218.47,5496.53) ; v1(6490,4430) 6490,4540 v1(6495,4540) ; v1(6500,5005) v1(6615,5005)
SDA: J1.3 J2.3 J3.3 J7.29 J11.3 R20.1 U2.5 | length 14989.1
  Top Layer w10: J3.3@2646.1,1941.54 2646.1,2005.14 2687.96,2047 6262.96,2047 6345,2129.04 6345,2330 6310,2365 v1(6250,2365) ; J1.3@3290.63,5730 3290.63,5775.63 3293,5778 3350,5778 3354.15,5773.85 3354.15,5753.42 3371.14,5736.43 4208.57,5736.43 4215,5730 v1(4235,5730) ; v1(4350,5835) 4350,5824.04 4707.04,5467 5193.74,5467 ; J2.3@5193.74,5878.27 5193.74,5467 ; J7.29@6116.73,4183.47 v1@6235,4183.47 ; J11.3@6246.73,2638.11 6175,2638.11 v1(6175,2640) 6175,2685 6205,2715 6230,2715 6235,2720 v1(6235,4175) v1@6235,4183.47 ; R20.1@6270,4169.69 6256.22,4183.47 v1@6235,4183.47 ; v1(6360,4185) 6430,4185 6465,4220 v1(6465,4430) ; v1(6440,5045) 6465,5045 ; v1(6465,4540) 6465,5045 ; v1(6610,5045) 6620,5045 6669,4996 7813.04,4996 8157.04,4652 8362.04,4652 8662.04,4352 9237,4352 9250,4365 U2.5@9250,4577.48 ; 5193.74,5467 5847,5467 5905,5525 6340,5525 6465,5400 6465,5045
  Bottom Layer w10: v1(4235,5730) 4340,5835 v1(4350,5835) ; v1(6175,2640) 6150,2615 6150,2445 6230,2365 v1(6250,2365) ; v1(6235,4175) 6245,4185 v1(6360,4185) ; v1(6440,5045) v1(6610,5045) ; v1(6465,4430) v1(6465,4540)
SPARE1_LED: J7.17 Q6.1 | length 5214.2
  Top Layer w10: Q6.1@2711.61,2367.6 2809.21,2270 3695,2270 3880,2455 3880,2595 4342,3057 4342,3347.04 4321.18,3367.86 4321.18,4061.18 4333,4073 5707.96,4073 5722.96,4058 5888,4058 5905,4075 v1(5945,4075) ; v1(6050,4275) 6044,4281 6044,4404 6059.69,4419.69 J7.17@6116.73,4419.69
  Bottom Layer w10: v1(5945,4075) 5990,4075 6050,4135 v1(6050,4275)
SPARE2_LED: J7.16 Q5.1 | length 4085.4
  Top Layer w10: Q5.1@3633.31,2657.6 3917.6,2657.6 4325,3065 4325,3340 4304.18,3360.82 ; v1(5890,4095) 5870,4075 5730,4075 5715,4090 4315,4090 4304.18,4079.18 4304.18,3360.82 ; v1(6025,4250) 6025,4410 6054.37,4439.37 J7.16@6116.73,4439.37 ; 4304.18,3360.82 4304.18,3335.97 4297.37,3342.78 4297.37,3367.63 4304.18,3360.82
  Bottom Layer w10: v1(5890,4095) 5891,4096 5953.7,4096 5954.7,4095 5980,4095 6020,4135 6020,4245 v1(6025,4250)
Vin: J13.1 J13.2 Q1.1 Q1.2 Q1.5 Q1.6
W\A\T\C\H\D\O\G\_\R\E\S\E\T\: J10.15 U2.11 | length 1799.4
  Top Layer w10: J10.15@8006.22,4320 8006.22,4335 8130,4335 8175,4380 v1(8175,4605) ; v1(8175,4690) 8340,4855 8685,4855 8800,4970 9095,4970 9200,4865 U2.11@9200,4762.52
  Bottom Layer w10: v1(8175,4605) v1(8175,4690)
WAKE_SAT: J6.23 J9.27 R28.2 | length 5955.1
  Top Layer w10: J6.23@4471.73,2337.8 5402.8,2337.8 5610,2545 5610,2845 5975,3210 v1(6175,3210) ; v1(7360,5600) 7579.37,5819.37 R28.2@7635,5819.37 7635,5865 7649.37,5879.37 J9.27@7868.27,5879.37
  Bottom Layer w10: v1(6175,3210) 6202.88,3210 6329.27,3336.4 6329.27,3845.23 6667,4182.96 6667,5192 7075,5600 v1(7360,5600)
WATCHDOG_LED: Q10.1 U2.10 | length 10872.3
  Top Layer w10: v1(2370,4880) 2370,5840 2733,6203 4313,6203 4635,6525 7185,6525 v1(7235,6475) ; v1(2530,4715) 2640,4715 3047.6,4307.4 3047.6,3842.6 Q10.1@2978.31,3842.6 ; v1(7330,6475) 8505,6475 9250,5730 U2.10@9250,4762.52
  Bottom Layer w10: v1(2370,4880) 2370,4875 v1(2530,4715) ; v1(7235,6475) v1(7330,6475)
WATCHDOG_WARN: J10.12 R45.2 | length 1577.4
  Top Layer w10: J10.12@7947.17,4320 7947.17,4267.83 7955,4260 8005,4260 8063,4318 9277.04,4318 9281.92,4322.88 9282.88,4322.88 9350,4390 R45.2@9350,4455.31
WD3.3V: C12.1 C14.1 J14.2 R43.1 R44.1 U2.1 U3.1 | length 7231
  Top Layer w10: R43.1@2949.53,3745 3195,3745 3485,4035 v1(4195,4035) ; v1(4355,4035) 4376,4056 5700.92,4056 5715.92,4041 5729,4041 5730,4040 6105,4040 v1(6155,3990) ; v1(6390,3985) 8035,3985 8163.11,4113.11 U3.1@8480,4113.11 8480,4170 8495,4185 C14.1@8520.32,4185 8520.32,4245.31 8560,4285 v1(8975,4285) ; J14.2@8825,4735 8805,4715 8805,4665 8835,4635 8955,4635 8974.68,4615.31 C12.1@8974.68,4575 ; v1(8975,4380) 8975,4574.68 C12.1@8974.68,4575 ; R44.1@9155.32,4495 9065,4495 9050,4510 U2.1@9050,4577.48 8977.17,4577.48 C12.1@8974.68,4575
  Bottom Layer w10: v1(4195,4035) v1(4355,4035) ; v1(6155,3990) 6385,3990 v1(6390,3985) ; v1(8975,4285) v1(8975,4380)
pads on no net: D2.2 D3.MH D4.MH D5.MH D6.MH D7.MH D8.MH D9.MH D10.MH D11.MH D18.MH H1.MH H2.MH H3.MH H4.MH H5.MH H6.MH H7.MH H8.MH H9.MH H10.MH H11.MH H12.MH H13.MH H14.MH H15.MH H16.MH H17.MH H18.MH H19.MH H20.MP H21.1 H22.1 H23.1 H24.1 H25.1 H26.1 H27.MP H28.MP H29.MP H30.MP H31.MP H32.MP H33.MP H34.MP H35.MP H36.MP H37.MP J1.MH J1.MP1 J1.MP2 J2.MH J2.MP1 J2.MP2 J3.MH J3.MP1 J3.MP2 J4.MH J4.MP1 J4.MP2 J5.MH J5.MP1 J5.MP2 J6.20 J6.MH J6.MP1 J6.MP2 J7.MH J7.MP1 J7.MP2 J8.MH J8.MP1 J8.MP2 J9.MH J9.MP1 J9.MP2 J10.MH J10.MP1 J10.MP2 J11.21 J11.22 J11.23 J11.24 J11.27 J11.MH J11.MP1 J11.MP2 J12.MH J12.MP1 J12.MP2 J14.6 J14.MH U2.2 U2.3 U2.9 U4.GD U5.GD U6.GD U7.GD

## Polygon pours and split planes (outlines as drawn)
Vin on Top Layer "VIN_L01_P000" (solid, pour order 0): 8880,3715 8880,3490 8985,3385 9475,3385 9530,3440 9530,3715
NetD2_3 on Top Layer "NETD2_3_L01_P002" (solid, pour order 2): 8870,3610 8150,3610 8120,3580 8120,3345 8170,3295 8745,3295 8870,3420
FVin on Top Layer "FVIN_L01_P004" (solid, pour order 4): 8510,4010 8540,3980 8650,3980 8705,3925 8705,3780 8690,3765 8645,3765 8630,3750 8630,3625 8140,3625 8125,3640 8125,3730 8115,3740 8040,3740 8015,3765 8015,3920 8105,4010
PVin on Top Layer "PVIN_L01_P006" (solid, pour order 6): 8005,3865 8010,3860 8010,3685 7980,3655 7940,3655 7830,3545 7675,3545 7645,3575 7570,3575 7550,3595 7550,3670 7560,3680 7640,3680 7680,3720 7805,3720 7825,3740 7825,3860 7830,3865
PVin on Top Layer "PVIN_L01_P008" (solid, pour order 8): 2775,1840 2775,1715 2790,1700 2880,1700 2895,1715 2895,1840
NetC3_1 on Top Layer "NETC3_1_L01_P010" (solid, pour order 10): 7440,3575 7470,3545 7470,3435 7480,3425 7805,3425 7825,3405 7825,2910 7805,2890 7275,2890 7195,2970 7195,3510 7260,3575
5V on Top Layer "5V_L01_P012" (solid, pour order 12): 6740,3660 6740,2960 6820,2880 7090,2880 7180,2970 7180,3515 7280,3615 7280,3810 7210,3810 7100,3700 6780,3700 6755,3675
GND on Top Layer "GND_L01_P014" (solid, pour order 14): 8120,4025 8190,4095 8520,4095 8550,4125 8550,4215 8585,4250 9510,4250 9545,4215 9545,3760 9510,3725 8850,3725 8820,3695 8760,3695 8745,3710 8745,3920 8665,4000 8550,4000 8525,4025
GND on Top Layer "GND_L01_P016" (solid, pour order 16): 7585,3445 7585,3465 7650,3530 7850,3530 7900,3580 7980,3580 8085,3475 8085,3340 8160,3265 8310,3265 8335,3240 8335,2805 8090,2560 7860,2560 7805,2615 7805,2870 7840,2905 7840,3410 7810,3440 7590,3440
GND on Top Layer "GND_L01_P020" (solid, pour order 20): 7795,3735 7810,3750 7810,3915 7785,3940 6630,3940 6475,3785 6475,3250 6485,3240 6720,3240 6725,3245 6725,3670 6770,3715 7095,3715 7195,3815 7295,3815 7295,3870 7340,3870 7345,3865 7345,3745 7360,3730 7430,3730 7435,3725 7435,3635 7430,3630 7295,3630 7290,3625 7290,3585 7450,3585 7485,3550 7485,3520 7490,3515 7535,3515 7540,3520 7540,3800 7550,3810 7620,3810 7630,3800 7630,3745 7640,3735
PVin on Top Layer "PVIN_L01_P022" (solid, pour order 22): 4940,6155 4940,5985 4950,5975 5060,5975 5065,5980 5065,6155
GND on Internal Plane 1 (split plane): 286 vertices, not listed, extent 1020.1,1020.1 9729.9,6604.9
5V on Internal Plane 2 (split plane): 9729.9,1020.1 1020.1,1020.1 1020.1,6604.9 9729.9,6604.9

## Other copper
Internal Plane 1 (plane layer: these items are gaps in the copper):
  lines w15: 1000,3430 3480,3430 3735,3175 4330,3175 6035,3175 6955,2255 8205,2255 9220,3270 ; 3675,6620 3675,4175 4205,3645 5765,3645 ; 5765,4010 8065,4010 8145,4090 8575,4090 8655,4010 8755,3910 8952.2,3910 9104.41,3757.8 ; 6155,3055 6150,3055 5945,2850 5945,2295 6410,1830 8010,1830 8310,1530 8995,1530 9290,1825 9290,2845 ; 9104.41,3620 9025,3540.59 9025,3480 8085,2540 7065,2540 5960,3645 5765,3645 ; 9240,3985 9240,5335 8520,6055 6075,6055 5765,5745 5765,3645

## Silkscreen, mask and mechanical layers (free items; w line width, h text height)
Top Overlay:
  text "Modular Parent MotherBoard Rev B" at 6025,1740 h150
  text "Latium Technologies" at 6510,1585 h130
  text "DESIGNED IN CANADA" at 6570,1500 h100
  text "04/2020" at 6835,1405 h100
Bottom Overlay:
  text "M3x0.5" at 4820,6470 h100 r90
  text "M3x0.5" at 9175,6470 h100 r90
  text "M3x0.5" at 1640,6465 h100 r90
  text "a" at 4835,6375 h150 r180
  text "a" at 9190,6375 h150 r180
  text "a" at 1565,6280 h150
  text "CELL ACTIVITY" at 2650,5560 h100 r90
  text "CELL STATE" at 3665,5340 h100 r90
  text "LoRa ACTIVITY" at 1765,5055 h100 r90
  text "TS-4900 RED" at 4360,4570 h100 r90
  text "WATCHDOG" at 2735,4045 h100 r90
  text "HEARTBEAT" at 1435,3995 h100 r90
  text "TS-4900 GREEN" at 4360,3605 h100 r90
  text "SAT ACTIVITY" at 1575,3140 h100 r90
  text "SPARE 2" at 3660,2670 h100 r90
  text "SPARE 1" at 2645,2485 h100 r90
  text "M3x0.5" at 4825,1440 h100 r90
  text "M3x0.5" at 9175,1440 h100 r90
  text "M3x0.5" at 1635,1435 h100 r90
  text "a" at 4840,1345 h150 r180
  text "a" at 9190,1345 h150 r180
  text "a" at 1560,1250 h150
Mechanical 1:
  the board outline again, w8